# EAGLE board MetaPixel3 (EAGLE 7.2.0)

Size 89.84 x 74.92 mm. Coordinates in mm from the lower left corner, seen from the top.
Outline: 0,0 89.84,0 89.84,74.92 0,74.92 0,0
Copper layers (1*16): Top 0.035mm / dielectric 1.5mm / Bottom 0.035mm
Design rules "Zwilling": minimum track width 0.2mm, minimum drill 0.5mm, track to track 0.2mm, track to pad 0.2mm, pad to pad 0.15mm, via to via 0.2mm, smd to smd 0mil, copper to edge 0.2mm, drill to drill 0.2mm, minimum pad ring 0.2mm, minimum via ring 0.2mm, stop-mask expansion 0.1mm, vias tented up to drill 0mil, thermal gap 10mil
Net classes: 0 default: width 0.2 mm; 1 SUPPLY: width 0.4 mm
Holes 3 mm at 2.54,72.39 86.36,72.39 2.54,2.54 86.36,2.54

## Footprints (pad centres in the part's own frame; a part is rotated, then mirrored left to right if it is on the bottom)
C025-030X050 = drill 0.813 octagon: 1 -1.27,0; 2 1.27,0
NME = drill 0.813 long: 1 0,3.81; 2 0,1.27; 3 0,-1.27; 4 0,-3.81
DIL08 = drill 0.813 long: 1 -3.81,-3.81; 2 -1.27,-3.81; 3 1.27,-3.81; 4 3.81,-3.81; 5 3.81,3.81; 6 1.27,3.81; 7 -1.27,3.81; 8 -3.81,3.81
DIL20 = drill 0.813 long: 1 -11.43,-3.81; 2 -8.89,-3.81; 3 -6.35,-3.81; 4 -3.81,-3.81; 5 -1.27,-3.81; 6 1.27,-3.81; 7 3.81,-3.81; 8 6.35,-3.81; 9 8.89,-3.81; 10 11.43,-3.81; 11 11.43,3.81; 12 8.89,3.81; 13 6.35,3.81; 14 3.81,3.81; 15 1.27,3.81; 16 -1.27,3.81; 17 -3.81,3.81; 18 -6.35,3.81; 19 -8.89,3.81; 20 -11.43,3.81
DIL08' = drill 0.813 offset: 1 -3.81,-3.81; 2 -1.27,-3.81; 3 1.27,-3.81; 4 3.81,-3.81; 5 3.81,3.81; 6 1.27,3.81; 7 -1.27,3.81; 8 -3.81,3.81
0207/7 = drill 0.813 octagon: 1 -3.81,0; 2 3.81,0
0207/10 = drill 0.813 octagon: 1 -5.08,0; 2 5.08,0
ML14 = drill 0.914 octagon: 1 -7.62,-1.27; 2 -7.62,1.27; 3 -5.08,-1.27; 4 -5.08,1.27; 5 -2.54,-1.27; 6 -2.54,1.27; 7 0,-1.27; 8 0,1.27; 9 2.54,-1.27; 10 2.54,1.27; 11 5.08,-1.27; 12 5.08,1.27; 13 7.62,-1.27; 14 7.62,1.27
TEENSY_3.0_BASIC = drill 0.965: 0 -7.62,13.97; 1 -7.62,11.43; 2 -7.62,8.89; 3 -7.62,6.35; 3.3V 7.62,11.43; 3.3V1 -2.54,-16.51; 4 -7.62,3.81; 5 -7.62,1.27; 6 -7.62,-1.27; 7 -7.62,-3.81; 8 -7.62,-6.35; 9 -7.62,-8.89; 10 -7.62,-11.43; 11 -7.62,-13.97; 12 -7.62,-16.51; 13 7.62,-16.51; 14/A0 7.62,-13.97; 15/A1 7.62,-11.43; 16/A2 7.62,-8.89; 17/A3 7.62,-6.35; 18/A4 7.62,-3.81; 19/A5 7.62,-1.27; 20/A6 7.62,1.27; 21/A7 7.62,3.81; 22/A8 7.62,6.35; 23/A9 7.62,8.89; AGND 7.62,13.97; GND -7.62,16.51; GND1 0,-16.51; PGM 2.54,-16.51; RESET 5.08,-16.51; VBAT -5.08,-16.51; VIN 7.62,16.51
RIA_182_2 = drill 1.5 pad 2.54 octagon: 1 0,-1.75; 2 0,1.75
RIA_182_3 = drill 1.5 pad 2.54 octagon: 1 2.3,2.55; 2 2.3,6.05; 3 2.3,9.65

## Placement (x,y rotation side)
C1  100n  [C025-030X050]  36.83,33.02 0 top
C2  100n  [C025-030X050]  54.61,33.02 0 top
C3  100n  [C025-030X050]  54.61,41.91 0 top
C4  100n  [C025-030X050]  13.97,64.77 90 top
DC1  NME0505  [NME]  13.97,52.07 0 top
IC1  MAX481CPA  [DIL08]  36.83,54.61 0 top
IC2  74HCT245N  [DIL20]  67.31,45.72 270 top
OK1  6N137  [DIL08']  45.72,40.64 270 top
OK2  6N137  [DIL08']  54.61,24.13 0 top
OK3  6N137  [DIL08']  38.1,24.13 0 top
R1  562  [0207/7]  27.94,57.15 270 top
R2  562  [0207/7]  44.45,58.42 90 top
R3  133  [0207/7]  36.83,62.23 180 top
R4  470  [0207/10]  21.59,52.07 90 top
R5  4k7  [0207/10]  33.02,40.64 270 top
R6  4k7  [0207/10]  45.72,27.94 270 top
R7  4k7  [0207/10]  24.13,44.45 90 top
R8  470  [0207/10]  27.94,36.83 90 top
R9  470  [0207/10]  27.94,24.13 270 top
SV1  UI-Port  [ML14]  38.1,11.43 180 top
U$1  TEENSY_3.0_BASIC  [TEENSY_3.0_BASIC]  13.97,20.32 180 top
X1  RIA_182_2  [RIA_182_2]  8.89,64.77 180 top
X2  RIA_182_2  [RIA_182_2]  8.89,45.72 180 top
X3  RIA_182_3  [RIA_182_3]  62.23,63.5 90 top
X4  RIA_182_3  [RIA_182_3]  29.21,63.5 90 top

## Library data of the parts
C1-C4 R4-R6 = rcl
DC1 = dc-dc-converter; MF: C & D TECHNOLOGIES, INC; MPN: NME1205D; OC_FARNELL: 1021466; OC_NEWARK: 98B8198
IC1 = maxim; MPN: MAX481CPA+; OC_FARNELL: unknown; OC_NEWARK: 99K3445
IC2 = 74xx-eu
OK1-OK3 = optocoupler; MPN: 6N137; OC_FARNELL: 1328376; OC_NEWARK: 52M1895
R1-R3 R7-R9 = resistor
SV1 = con-harting-ml; OC_FARNELL: unknown; OC_NEWARK: unknown
U$1 = Teensy3.0
X1-X4 = BlaBlub_USER

## Nets
3.3V: U$1.3.3V U$1.3.3V1
+5V_EXT [SUPPLY]: C1.1 C2.1 C3.1 DC1.4 IC1.8 OK2.7 OK2.8 OK3.7 OK3.8 R1.2 R5.1 R6.1
AGND: U$1.AGND
DMX+: IC1.7 R1.1 R3.2 X3.1 X4.1
DMX-: IC1.6 R2.2 R3.1 X3.2 X4.2
DMX_DIR: IC2.13 R8.1
DMX_DIR3V: IC2.7 U$1.9
DMX_IN: OK1.6 R7.1 U$1.7
DMX_OUT: IC2.14 R9.1
DMX_OUT3V: IC2.6 U$1.8
ENC_DIR: SV1.11 U$1.4
ENC_PULSE: SV1.7 U$1.6
ENC_STEP: SV1.9 U$1.5
GND [SUPPLY]: C4.2 DC1.1 IC2.10 IC2.19 OK1.5 SV1.13 SV1.14 U$1.GND U$1.GND1 X1.1
GND_EXT [SUPPLY]: C1.2 C2.2 C3.2 DC1.3 IC1.5 OK1.3 OK2.5 OK3.5 R2.1 X3.3 X4.3
LCD_CLK: IC2.16 SV1.12
LCD_CLK3V: IC2.4 U$1.2
LCD_CS: IC2.17 SV1.10
LCD_CS3V: IC2.3 U$1.1
LCD_DATA: IC2.15 SV1.8
LCD_DATA3V: IC2.5 U$1.3
LED_OUT: IC2.18 X2.2
LED_OUT3V: IC2.2 U$1.0
N$1: OK1.2 R4.1
N$2: IC1.1 R4.2
N$3: IC1.2 IC1.3 OK2.6 R5.2
N$4: IC1.4 OK3.6 R6.2
N$5: OK3.3 R9.2
N$6: OK2.3 R8.2
VBAT: U$1.VBAT
VCC [SUPPLY]: C4.1 DC1.2 IC2.1 IC2.20 OK1.7 OK1.8 OK2.2 OK3.2 R7.2 SV1.1 SV1.2 U$1.VIN X1.2

## Tracks (layer width: path | path; a pad name or v marks a point on that pad's centre or on a via)
3.3V  (1 unrouted)
+5V_EXT  (11 unrouted)
DMX+  (4 unrouted)
DMX-  (4 unrouted)
DMX_DIR  (1 unrouted)
DMX_DIR3V  (1 unrouted)
DMX_IN  (2 unrouted)
DMX_OUT  (1 unrouted)
DMX_OUT3V  (1 unrouted)
ENC_DIR  (1 unrouted)
ENC_PULSE  (1 unrouted)
ENC_STEP  (1 unrouted)
GND  (9 unrouted)
GND_EXT  (10 unrouted)
LCD_CLK  (1 unrouted)
LCD_CLK3V  (1 unrouted)
LCD_CS  (1 unrouted)
LCD_CS3V  (1 unrouted)
LCD_DATA  (1 unrouted)
LCD_DATA3V  (1 unrouted)
LED_OUT  (1 unrouted)
LED_OUT3V  (1 unrouted)
N$1  (1 unrouted)
N$2  (1 unrouted)
N$3  (3 unrouted)
N$4  (2 unrouted)
N$5  (1 unrouted)
N$6  (1 unrouted)
VCC  (12 unrouted)